# Altium PCB XPCAM_1V4.PCBDOC (part 2 of 2)
Units mil, origin at the board's own origin, x right, y up, seen from the top; angles counter-clockwise.
Board outline 2183.56 x 1446.93 mil, 6 copper layers (Top Layer, Mid-Layer 1, Mid-Layer 2, Mid-Layer 3, Mid-Layer 4, Bottom Layer); 49 components, 32 nets, 261 pads, 143 vias.
Unrouted connection lines stored in the file: 46.
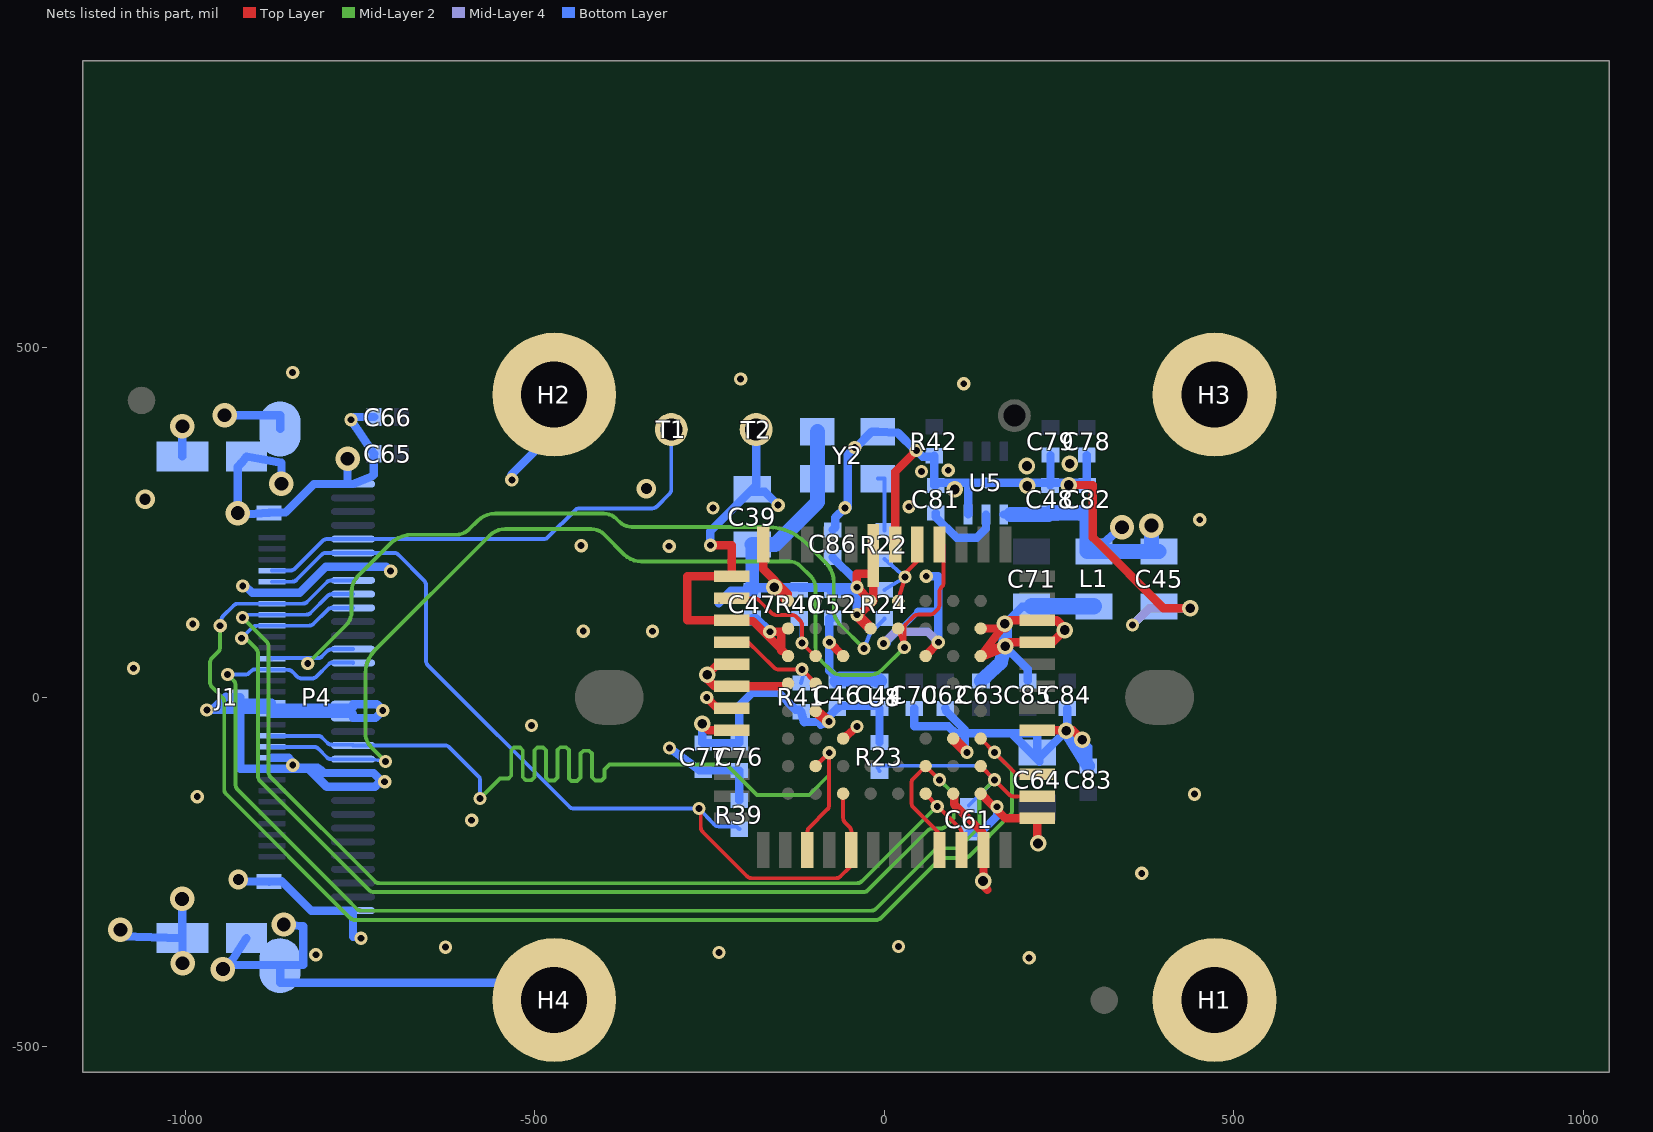
[diagram p5: the nets of this part, all layers, seen from the top]

## Via types
v1: diameter 19, hole 9.84, Top Layer to Bottom Layer, 101 vias
v2: diameter 23.62, hole 13.78, Top Layer to Bottom Layer, 22 vias
v3: diameter 35, hole 19.68, Top Layer to Bottom Layer, 12 vias
v4: diameter 16, hole 7.87, Top Layer to Bottom Layer, 3 vias
v5: diameter 27.95, hole 15.75, Top Layer to Bottom Layer, 3 vias
v6: diameter 20.47, hole 11.81, Top Layer to Bottom Layer, 1 vias
v7: diameter 0, hole 0, Top Layer to Bottom Layer, 1 vias

## Nets (pads, with @x,y where several pads share a name; then routed paths per layer and width w, separated by ;. In a path a pad name is that pad's centre, name@x,y a point inside that pad or via, vN(x,y) a via of type N, cw(c..) or ccw(c..) an arc to the next point about the centre after c; other vN are vias at no path point) (continued)
CMOS_OE: J1.23 P4.9 U1.H6 U8.28 | length 1605.4
  Top Layer w5.5: U1.H6@59.06,-137.8 59.06,-138.5 107.42,-186.86 cw(c100.61,-193.66) 110.24,-193.66 U8.28@110.24,-218.5
  Top Layer w6: U1.H6@59.06,-137.8 v1(75.54,-156.29)
  Mid-Layer 2 w5.5: v1(-918.33,114.17) -884.03,79.87 cw(c-890.83,73.06) -881.21,73.06 -881.21,-107 ccw(c-871.58,-107) -878.39,-113.8 -729.03,-263.17 ccw(c-722.22,-256.36) -722.22,-265.98 -39.08,-265.98 ccw(c-39.08,-256.36) -32.27,-263.17 70.59,-160.3 cw(c77.4,-167.11) 77.4,-157.48 v1(75.54,-156.29)
  Bottom Layer w5.5: v1(-918.33,114.17) -917.22,115.29 cw(c-910.41,108.49) -910.41,118.11 J1.23@-876.39,118.11 -827.6,118.11 ccw(c-827.6,127.74) -820.8,120.93 -796.9,144.82 cw(c-790.1,138.02) -790.1,147.64 P4.9@-760.25,147.64
CMOS_PCLK: J1.11 P4.21 U1.B5 U8.46 | length 1543.9
  Top Layer w5.5: v1(28.5,71.46) 28.5,98.44 cw(c38.13,98.44) 31.32,105.25 41.58,115.51 cw(c48.39,108.7) 48.39,118.33 64.65,118.33 ccw(c64.65,127.95) 71.45,121.15 75.94,125.64 ccw(c69.14,132.44) 78.76,132.44 78.76,150.56 cw(c88.39,150.56) 81.58,157.36 81.82,157.6 ccw(c75.01,164.41) 84.64,164.41 84.64,217.8 78.74,217.8 U8.46@78.74,218.5
  Top Layer w6: U1.B5@19.69,98.43 v1(28.5,71.46)
  Mid-Layer 2 w5.5: v1(-713.88,-91.85) -733.94,-71.79 cw(c-713,-50.85) -742.61,-50.85 -742.61,33.88 cw(c-694.76,33.88) -728.6,67.71 -565.11,231.2 cw(c-541.88,207.98) -541.88,240.82 -419.66,240.82 cw(c-419.67,214.25) -400.88,233.04 -372.36,204.52 ccw(c-347.35,229.53) -347.35,194.16 -135.42,194.16 cw(c-135.42,172.98) -120.44,187.95 -105.25,172.77 cw(c-121.47,156.55) -98.54,156.55 -98.54,72.05 ccw(c-70.35,72.05) -90.28,52.12 -76.34,38.18 ccw(c-61.3,53.22) -61.3,31.95 -21.18,31.95 ccw(c-21.18,56.51) -3.81,39.15 v1(28.5,71.46)
  Bottom Layer w5.5: J1.11@-876.39,-70.87 -816.64,-70.87 cw(c-816.64,-80.49) -809.84,-73.69 -797.76,-85.76 ccw(c-790.95,-78.96) -790.95,-88.58 P4.21@-760.25,-88.58 -734.54,-88.58 cw(c-734.54,-98.21) -732.98,-88.71 v1(-713.88,-91.85)
CMOS_RST: C61.2 J1.18 P4.14 R23.1 U1.G8 U8.32 | length 1954
  Top Layer w5.5: v1(157.48,-118.11) 178.28,-138.91 ccw(c185.09,-132.11) 185.09,-141.73 U8.32@218.5,-141.73
  Top Layer w6: U1.G8@137.8,-98.43 v1(157.48,-118.11)
  Mid-Layer 2 w5.5: v1(-939.64,32.5) -930.97,23.83 cw(c-937.78,17.02) -928.15,17.02 -928.15,-125.32 ccw(c-918.53,-125.32) -925.33,-132.12 -768.79,-288.66 -768.79,-288.75 -754.99,-302.55 ccw(c-748.18,-295.75) -748.18,-305.37 -18.97,-305.37 ccw(c-18.97,-295.75) -12.17,-302.55 71.62,-218.77 cw(c78.42,-225.57) 78.42,-215.95 101.56,-215.95 ccw(c101.56,-206.32) 108.37,-213.13 133.45,-188.05 ccw(c126.64,-181.24) 136.27,-181.24 136.27,-143.31 cw(c145.89,-143.31) 139.09,-136.5 v1(157.48,-118.11)
  Bottom Layer w5.5: v1(-939.64,32.5) -914.96,32.5 ccw(c-914.96,42.12) -908.11,35.36 -906.25,37.24 cw(c-899.4,30.48) -899.4,40.11 cw(c-899.4,30.48) -899.09,40.1 J1.18@-876.39,39.37 -853.82,39.37 cw(c-853.82,29.75) -847.02,36.55 -840.24,29.77 ccw(c-833.43,36.58) -833.43,26.95 -819.12,26.95 ccw(c-819.12,36.58) -812.32,29.77 -794.88,47.21 cw(c-788.07,40.4) -788.07,50.03 -760.3,50.03 P4.14@-760.25,49.21 ; R23.1@-7.1,-105.57 -9.96,-100.73 cw(c-3.15,-107.54) -3.15,-97.91 133.29,-97.91 cw(c133.29,-107.54) 140.1,-100.73 v1(157.48,-118.11) 120.75,-154.84 C61.2@120.61,-154.84
CMOS_VD: J1.12 P4.20 U1.G2 U8.21 | length 1447.5
  Top Layer w5.5: U8.21@-110.24,-218.5 -110.24,-193.03 cw(c-100.61,-193.03) -107.42,-186.22 -81.92,-160.73 ccw(c-88.73,-153.92) -79.1,-153.92 -79.1,-79.6 v1(-78.88,-79.38)
  Top Layer w6: U1.G2@-98.43,-98.43 v1(-78.88,-79.38)
  Mid-Layer 2 w5.5: v1(-578.45,-144.87) -549.85,-116.28 -537.97,-116.28 -533.85,-112.15 -533.85,-75.78 -529.72,-71.66 -521.47,-71.66 -517.35,-75.78 -517.35,-114.43 -513.22,-118.56 -504.97,-118.56 -500.85,-114.43 -500.85,-75.81 -496.72,-71.69 -488.47,-71.69 -484.35,-75.81 -484.35,-114.99 -480.22,-119.12 -471.97,-119.12 -467.85,-114.99 -467.85,-75.61 -463.72,-71.49 -455.47,-71.49 -451.35,-75.61 -451.35,-116.32 -447.99,-119.68 -439.74,-119.68 -434.85,-114.79 -434.85,-80.62 -430.72,-76.49 -422.47,-76.49 -418.35,-80.62 -418.35,-114.39 -413.62,-119.12 -405.01,-119.12 -400.67,-114.78 -400.67,-103.36 -393.22,-95.91 -226.1,-95.91 -182.44,-139.57 -107.6,-139.57 -78.88,-110.85 v1(-78.88,-79.38)
  Bottom Layer w5.5: J1.12@-876.39,-55.12 -810.99,-55.12 cw(c-810.99,-64.74) -804.18,-57.94 -797.09,-65.04 ccw(c-790.28,-58.23) -790.28,-67.86 -760.43,-67.86 P4.20@-760.25,-68.9 -628.8,-68.9 cw(c-628.8,-78.53) -622,-71.72 -581.26,-112.45 cw(c-588.07,-119.26) -578.45,-119.26 v1(-578.45,-144.87)
DGND: C39.1 C44.1 C45.1 C46.1 C47.1 C48.1 C52.1 C61.1 C65.1 C66.1 C76.2 C77.1 C78.1 C79.1 C81.1 C82.1 C86.1 H1.1 H2.1 H3.1 H4.1 J1.9 J1.10 J1.14 J1.15 J1.25 J1.33 J1.34 J1.35 J1.36 J1.37 J1.38 J1.39 P4.1 P4.7 P4.17 P4.18 P4.22 P4.23 P4.32 P4.33 P4.34 R39.2 R42.1 T2.1 U1.B1 U1.C1 U1.C3 U1.C6 U1.D1 U1.F3 U1.H7 U1.H8 U5.3 U5.7 U8.7 U8.9 U8.11 U8.12 U8.13 U8.29 U8.31 U8.48 Y2.2 | length 6791.9
  Top Layer w12: v1(-254.26,-0.2) -238.71,-15.75 U8.13@-218.5,-15.75 ; v1(-248.96,217.58) -218.5,217.58 U8.7@-218.5,173.23 -282.17,173.23 -282.17,110.24 U8.9@-218.5,110.24 -217.47,109.2 -187.94,109.2 -145.2,66.46 ; U8.11@-218.5,47.24 -220.3,45.45 -240.52,45.45 v2(-253.52,32.45) -252.73,31.66 -252.73,25.69 -242.78,15.75 U8.12@-218.5,15.75 -141.73,15.75 U1.D1@-137.8,19.69 ; v1(-163.94,93.79) -147.46,93.79 ; U1.C1@-137.8,59.06 -145.2,66.46 ; U1.B1@-137.8,98.43 -147.46,93.79 ; v1(-78.74,78.74) U1.C3@-59.06,59.06 ; U1.F3@-59.06,-59.06 v1(-39.07,-41.75) ; U8.48@15.75,218.5 15.75,323.05 v1(45.72,353.02) ; U1.C6@59.06,59.06 v1(77.19,78.74) ; U1.H7@98.43,-137.8 99.88,-137.8 99.88,-153.18 141.09,-194.4 141.09,-217.87 U8.29@141.73,-218.5 141.73,-270.06 147.33,-275.66 v2(141.12,-262.81) ; U1.H8@137.8,-137.8 v1@156.06,-156.06 ; v1(161.04,-156.52) v1@156.06,-156.06 ; v2(219.77,-209.08) 218.5,-209.08 U8.31@218.5,-173.23 173.23,-173.23 v1@156.06,-156.06 ; v2(263.82,303.7) 298.23,303.7 298.23,228.33 399.11,127.45 v2(437.51,127.45) ; -147.46,93.79 -147.46,66.46 -145.2,66.46
  Mid-Layer 4 w12: v1(-1.37,77.19) 15.03,93.59 62.34,93.59 v1(77.19,78.74) ; v1(355.07,103.39) 379.14,127.45 v2(437.51,127.45)
  Bottom Layer w7.87: v1@3.13,77.19 48.34,122.39
  Bottom Layer w12: v3(-1093.06,-332.62) -1093.06,-341.6 J1.36@-1004.34,-344.49 ; v3(-1004.82,-288.41) -1004.34,-293.69 J1.36@-1004.34,-344.49 ; J1.35@-1004.34,344.49 v3(-1004.34,387.69) ; v3(-1004.17,-380.42) -1004.17,-333.95 J1.36@-1004.34,-344.49 ; v3(-943.98,403.56) -864.58,403.56 P4.33@-864.58,383.86 ; v5(-924.24,-260.68) -922.01,-262.91 J1.37@-880.33,-263.78 -862.35,-262.91 -820.14,-305.12 P4.32@-760.25,-305.12 -760.25,-342.47 -751.04,-342.47 v1(-748.86,-344.65) ; v1(-918.05,159.16) -914.66,159.16 -904.48,149.74 ; J1.33@-912.61,-344.49 -932.6,-375.57 v3(-946.31,-388.81) -940.49,-382.99 -831.24,-382.99 ; J1.10@-876.39,-86.61 -852.31,-86.61 v1@-838.36,-100.57 ; J1.15@-876.39,-7.87 -921.67,-7.87 -921.67,-102.36 ; J1.25@-876.39,149.61 -876.52,149.74 -904.48,149.74 ; v3(-862.62,305.55) -862.62,335.51 J1.34@-912.61,344.49 -919.58,335.51 -925.09,330.01 v3(-925.09,263.5) -924.9,261.28 -919.45,261.28 J1.38@-880.33,263.78 -856.82,264.65 -816.35,305.12 P4.1@-768.06,305.12 ; v3(-859.25,-325.04) -831.24,-327.73 -831.24,-382.99 ; v3(-768.06,341.3) P4.1@-768.06,305.12 ; C66.1@-730.12,400.96 -759.25,400.96 v1(-763.19,397.02) C65.1@-730.11,348.23 -730.8,347.54 -730.8,318.04 -733.02,315.82 P4.1@-760.25,305.12 P4.1@-768.06,305.12 ; v1(-706.4,180.52) -712.88,187.01 P4.7@-760.25,187.01 -799.08,187.01 -836.36,149.74 -904.48,149.74 ; v1@-534.1,317.89 -458.29,393.7 H2.1@-472.44,433.07 ; H4.1@-472.44,-433.07 -433.07,-387.59 -436.8,-408.24 -864.58,-408.24 P4.34@-864.58,-383.86 -858.48,-382.99 -831.24,-382.99 ; v1(-307.44,-72.55) -264.96,-104.2 C77.1@-258.93,-104.78 C76.2@-207.5,-104.78 R39.2@-207.5,-147.63 ; v1(-248.96,217.58) -248.96,237.73 C39.1@-192.87,293.82 ; C47.1@-189.13,113.51 -183.66,113.51 v1(-163.94,93.79) ; T2.1@-183.44,383.03 -183.44,302.56 -184.13,302.56 C39.1@-189.13,297.56 C39.1@-192.87,293.82 ; v1(-151.98,274.9) -170.91,293.82 C39.1@-192.87,293.82 ; C52.1@-74,113.51 -78.74,113.51 v1(-78.74,78.74) -78.74,38.19 -62.9,22.34 C46.1@-67.43,23.55 ; C86.1@-74,239.56 -70.38,243.18 -70.38,257.16 v1(-56.49,271.05) -52.45,271.05 -52.45,347.3 v1(-42.36,357.39) -40.72,357.39 -18.18,379.92 Y2.2@-9.26,379.92 19.11,378.48 44.57,353.02 v1(45.72,353.02) 54.49,344.24 69.88,344.24 R42.1@71.48,345.84 C81.1@71.48,308.36 ; v1(-1.37,77.19) v1@3.13,77.19 ; 48.34,122.39 77.19,122.39 ; v1(59.91,173.25) 77.19,173.25 77.19,122.39 ; C81.1@73.34,303.02 71.48,303.02 C81.1@71.48,308.36 ; v1(77.19,78.74) 77.19,122.39 ; U5.3@119.67,261.49 119.67,306.77 U5.7@145.26,306.77 ; C61.1@120.61,-194.21 136.66,-194.21 161.04,-169.84 v1(161.04,-156.52) ; C48.1@236.86,303.02 237.68,303.85 C79.1@237.68,346.63 ; C78.1@289.43,346.63 289.43,303.85 C82.1@290.26,303.02 286.51,306.77 U5.7@145.26,306.77 ; v1(355.07,103.39) 379.28,127.59 390.65,127.59 C45.1@392.98,129.92 ; -921.67,-102.36 J1.9@-876.39,-102.36 -809.3,-102.36 ; -921.67,-102.36 J1.39@-921.67,0 -921.71,0 -942.25,0.87 -958.1,-14.98 v1(-969.38,-18.14) -880.22,-18.14 J1.14@-876.39,-23.62 ; J1.14@-876.39,-23.62 -876.39,-15.01 -760.25,-15.01 P4.17@-760.25,-9.84 -726.3,-9.84 -717.76,-18.39 v1(-717.76,-18.88) -717.76,-19.25 -728.04,-29.53 P4.18@-760.25,-29.53 -760.25,-23.62 J1.14@-876.39,-23.62 ; v1@-838.36,-100.57 -811.1,-100.57 -809.3,-102.36 ; v1@-838.36,-100.57 -837.43,-101.49 -824.26,-101.49 -797.8,-127.95 P4.23@-760.25,-127.95 -728.73,-127.95 -723.53,-122.74 -716.37,-122.74 -716.34,-120.79 v1(-714.99,-120.81) -716.99,-118.81 -718.64,-120.47 -730.84,-108.27 P4.22@-760.25,-108.27 -802.17,-108.27 -806.83,-103.62 -808.05,-103.62 -809.3,-102.36 ; C81.1@71.48,308.36 73.07,306.77 U5.7@145.26,306.77
  Bottom Layer w21.65: C46.1@-67.43,23.55 -62.9,26.34 -14.8,26.34 C44.1@-7.1,23.55
  other v1: 207.1,-372.76 -813.41,-368.28 -236.58,-364.95 -627.88,-357.48 20.13,-356.59 368.2,-251.84 -590.58,-175.96 -983.04,-142.14 443.77,-138.52 -846.47,-97.05 -504.87,-40.44 -1074.33,41.51 -331.75,94.45 -430.78,94.69 -989.49,104.61 -308.01,216.04 -433.84,216.93 451.1,253.94 -245.35,270.86 35.11,272.55 -533.03,311.13 53.16,323.2 91.32,324.79 113.58,448.53 -205.68,455.51 -846.65,464.82
  other v2: 100.81,297.39 204.28,302.34 203.94,330.92 265.33,334.14
  other v5: -1057.75,283.35 -340.57,298.67
EXPOSURE: J1.26 P4.6 R39.1 U1.H3 U8.23 | length 1335.1
  Top Layer w5.5: v1(-265.33,-159.2) v1@-264.07,-160.11 ; U1.H3@-59.06,-137.8 -59.06,-172.37 ccw(c-49.43,-172.37) -56.24,-179.17 -50.06,-185.34 cw(c-56.87,-192.15) -47.24,-192.15 U8.23@-47.24,-218.5 U8.23@-47.24,-236.63 ; v1@-264.07,-160.11 cw(c-269.68,-167.92) v1@-262.87,-161.12 ; v1@-264.07,-160.11 cw(c-269.68,-167.92) v1@-262.87,-161.12 ; v1@-262.87,-161.12 -262.73,-161.26 -262.73,-185.78 ; -262.73,-185.78 ccw(c-253.1,-185.78) -259.91,-192.58 ; -262.73,-185.78 ccw(c-253.1,-185.78) -259.91,-192.58 ; -259.91,-192.58 -196.48,-256.01 ; -196.48,-256.02 ccw(c-189.67,-249.21) -189.67,-258.83 ; -196.48,-256.02 ccw(c-189.67,-249.21) -189.67,-258.83 ; -189.67,-258.83 -69.44,-258.83 ; -69.44,-258.83 ccw(c-69.44,-249.21) -62.64,-256.02 ; -69.44,-258.83 ccw(c-69.44,-249.21) -62.64,-256.02 ; -62.64,-256.01 U8.23@-50.06,-243.44 ; U8.23@-50.06,-243.44 ccw(c-56.87,-236.63) U8.23@-47.24,-236.63 ; U8.23@-50.06,-243.44 ccw(c-56.87,-236.63) U8.23@-47.24,-236.63
  Bottom Layer w5.5: J1.26@-876.39,165.35 -875.69,165.37 cw(c-875.44,155.75) -875.44,165.38 -847.69,165.38 ccw(c-847.69,175) -840.88,168.19 -805.2,203.88 cw(c-798.4,197.07) -798.4,206.7 P4.6@-760.25,206.69 -702.12,206.7 cw(c-702.12,197.07) -695.32,203.88 -658.69,167.25 cw(c-665.49,160.44) -655.87,160.44 -655.87,52.51 ccw(c-646.24,52.51) -653.05,45.7 -450.97,-156.38 ccw(c-444.16,-149.57) -444.16,-159.2 v1(-265.33,-159.2) -243.95,-181.68 ccw(c-236.98,-175.04) -236.98,-184.67 -215.39,-184.67 cw(c-215.39,-194.29) -208.59,-187.49 R39.1@-207.5,-188.58
LEDOUT0: J1.22 P4.10 U1.G6 U8.27 | length 1728.3
  Top Layer w5.5: U1.G6@59.06,-98.43 41.37,-116.11 ccw(c48.18,-122.91) 38.55,-122.91 38.55,-150.87 ccw(c48.18,-150.87) 41.37,-157.68 75.92,-192.23 cw(c69.12,-199.04) 78.74,-199.04 U8.27@78.74,-218.5
  Top Layer w6: U1.G6@59.06,-98.43 v1(78.74,-118.11)
  Mid-Layer 2 w5.5: v1(-919.55,84.56) -917.95,84.56 cw(c-917.95,74.94) -911.14,81.74 -899.08,69.67 cw(c-905.88,62.87) -896.26,62.87 -896.26,-112.92 ccw(c-886.63,-112.92) -893.44,-119.73 -737.29,-275.88 ccw(c-730.48,-269.08) -730.48,-278.7 -30.21,-278.7 ccw(c-30.21,-269.08) -23.41,-275.88 61.97,-190.5 cw(c68.78,-197.31) 68.78,-187.68 80.9,-187.68 ccw(c80.9,-178.06) 87.7,-184.86 96.29,-176.28 ccw(c89.49,-169.47) 99.11,-169.47 99.11,-142.47 ccw(c89.49,-142.47) 96.29,-135.66 v1(78.74,-118.11)
  Bottom Layer w5.5: v1(-919.55,84.56) -904.57,99.54 cw(c-897.76,92.74) -897.76,102.36 J1.22@-876.39,102.36 -823.61,102.36 ccw(c-823.61,111.99) -816.8,105.18 -796.85,125.14 cw(c-790.04,118.33) -790.04,127.95 P4.10@-760.25,127.95
MCLK27M: R22.1 R24.1 U1.A5 U8.47 | length 163.2
  Top Layer w5.5: v1(29.4,171.97) 29.4,177.16 47.24,195.01 U8.47@47.24,218.5
  Top Layer w6: U1.A5@19.69,137.8 v1(29.4,171.97)
  Bottom Layer w5.5: R24.1@0,153.67 v1(29.4,171.97) R22.1@0,197.74
MCLK27M': J1.19 P4.13 R24.2 | length 1492.4
  Mid-Layer 2 w5.5: v1(-825.02,48.39) -770.4,103.01 ; v1(-29.19,69.82) -63.98,104.61 ; -770.4,103.01 ccw(c-790,122.61) -762.28,122.61 ; -770.4,103.01 ccw(c-790,122.61) -762.28,122.61 ; -762.28,122.61 -762.28,151.36 ; -762.28,151.36 cw(c-730.74,151.36) -753.04,173.66 ; -762.28,151.36 cw(c-730.74,151.36) -753.04,173.66 ; -753.04,173.66 -707.26,219.44 ; -707.26,219.44 cw(c-675.36,187.53) -675.36,232.66 ; -707.26,219.44 cw(c-675.36,187.53) -675.36,232.66 ; -675.36,232.66 -612.81,232.66 ; -612.81,232.66 ccw(c-612.81,259.17) -594.06,240.42 ; -612.81,232.66 ccw(c-612.81,259.17) -594.06,240.42 ; -594.06,240.42 -582.28,252.2 ; -582.28,252.2 cw(c-556.26,226.18) -556.26,262.98 ; -582.28,252.2 cw(c-556.26,226.18) -556.26,262.98 ; -556.26,262.98 -401.72,262.98 ; -401.72,262.98 cw(c-401.72,237.5) -383.7,255.52 ; -401.72,262.98 cw(c-401.72,237.5) -383.7,255.52 ; -383.7,255.52 -379.43,251.25 ; -379.43,251.25 ccw(c-361.09,269.59) -361.09,243.65 ; -379.43,251.25 ccw(c-361.09,269.59) -361.09,243.65 ; -361.09,243.65 -167.72,243.65 ; -167.73,243.65 cw(c-167.73,165.16) -112.22,220.66 ; -167.73,243.65 cw(c-167.73,165.16) -112.22,220.66 ; -112.22,220.66 -83.81,192.25 ; -83.81,192.25 cw(c-111.3,164.75) -72.42,164.75 ; -83.81,192.25 cw(c-111.3,164.75) -72.42,164.75 ; -72.42,124.99 ccw(c-43.6,124.99) -63.98,104.61 ; -72.42,124.99 ccw(c-43.6,124.99) -63.98,104.61 ; -72.42,124.99 -72.42,164.75
  Bottom Layer w5.5: J1.19@-876.39,55.12 -875.52,55.99 v1@-825.02,55.99 ; v1(-825.02,48.39) v1@-825.02,55.99 ; P4.13@-760.25,68.9 -790.29,68.9 ccw(c-790.29,59.27) -797.1,66.08 -804.37,58.8 cw(c-811.18,65.61) -811.18,55.99 v1@-825.02,55.99 ; v1(-29.19,69.82) -21.31,89.39 ; R24.2@0,112.73 0,111.79 -19.19,92.6 ; -21.31,89.39 cw(c-12.38,85.79) -19.19,92.6 ; -21.31,89.39 cw(c-12.38,85.79) -19.19,92.6
NETC81_2: C81.2 U5.2 | length 115.3
  Bottom Layer w11.81: C81.2@73.34,263.65 73.38,263.61 73.38,258.14 103.19,228.33 132.3,228.33 145.26,241.29 U5.2@145.26,261.49
NETR22_2: R22.2 Y2.3 | length 83.6
  Bottom Layer w5.5: Y2.3@-9.26,312.99 0,312.99 R22.2@0,238.68
NETR40_1: R40.1 U1.C2 U8.8 | length 206.6
  Top Layer w5.5: U8.8@-218.5,141.73 -186.67,141.73 cw(c-186.67,132.11) -179.86,138.91 -161.56,120.61 ccw(c-154.76,127.42) -154.76,117.79 -132.56,117.79 cw(c-132.56,108.17) -125.75,114.97 -120.8,110.02 cw(c-127.6,103.21) -117.98,103.21 -117.98,80.04 v1(-117.98,77.83) -118.25,77.55 -99.76,59.06 U1.C2@-98.43,59.06
  Bottom Layer w5.5: R40.1@-122.1,112.73 -118.4,105.33 -118.4,77.83 v1(-117.98,77.83)
NETR41_1: R41.1 U1.D2 U8.10 | length 167.4
  Top Layer w5.5: U8.10@-218.5,78.74 -194.54,78.74 -193.66,77.86 -178.8,63 -178.47,63 -158,42.53 ccw(c-151.19,49.33) -151.19,39.71 -118.2,39.71 v1(-117.95,39.96) -117.69,39.96 -117.17,39.44 -98.43,20.69 U1.D2@-98.43,19.69
  Bottom Layer w5.5: R41.1@-119.23,20.52 -114.7,37 -115.62,37.76 -116.67,40.38 v1(-117.95,39.96)
STANDBY: J1.24 P4.8 U1.F8 U8.33 | length 1934.8
  Top Layer w5.5: U1.F8@137.8,-59.06 v1(157.48,-78.74) 188.55,-109.81 188.55,-110.24 U8.33@218.5,-110.24
  Mid-Layer 2 w5.5: v1(-950.38,102.41) -950.38,71.74 cw(c-960.01,71.74) -953.2,64.94 -961.94,56.2 ccw(c-955.13,49.39) -964.76,49.39 -964.76,21.57 ccw(c-955.13,21.57) -961.94,14.77 -947.34,0.17 cw(c-954.15,-6.64) -944.52,-6.64 -944.52,-131.64 ccw(c-934.9,-131.64) -941.7,-138.45 -764.43,-315.72 ccw(c-757.62,-308.91) -757.62,-318.54 -11.74,-318.54 ccw(c-11.74,-308.91) -4.94,-315.72 78.2,-232.58 cw(c85.01,-239.39) 85.01,-229.76 114.75,-229.76 ccw(c114.75,-220.14) 121.55,-226.94 179.92,-168.57 ccw(c173.12,-161.76) 182.74,-161.76 182.74,-107.99 ccw(c173.12,-107.99) 179.92,-101.18 v1(157.48,-78.74)
  Bottom Layer w5.5: v1(-950.38,102.41) -949.03,103.76 -949.03,109.38 cw(c-939.4,109.38) -946.21,116.18 -931.35,131.04 cw(c-924.55,124.23) -924.55,133.86 J1.24@-876.39,133.86 -832.45,133.86 ccw(c-832.45,143.48) -825.64,136.68 -797.81,164.51 cw(c-791.01,157.7) -791.01,167.32 P4.8@-760.25,167.33
TEST1: J1.27 P4.5 T1.1 | length 704.9
  Bottom Layer w5.5: J1.27@-876.39,181.1 -875.96,181.53 -849.95,181.53 ccw(c-849.95,191.15) -843.14,184.35 -814.04,213.45 -803.93,223.56 cw(c-797.12,216.76) -797.12,226.38 P4.5@-760.25,226.38 -487.93,226.38 ccw(c-487.93,236.01) -481.13,229.2 -442.85,267.48 cw(c-436.04,260.67) -436.04,270.3 -332.32,270.3 ccw(c-332.32,279.92) -325.51,273.12 -307.76,290.87 ccw(c-314.56,297.68) -304.94,297.68 T1.1@-304.94,383.03
VAA3.3V: C62.2 C63.2 C64.2 C70.2 C71.2 C83.2 C84.2 C85.2 L1.2 U1.B8 U1.C8 U1.F7 U8.35 U8.39 U8.40 | length 1370.3
  Top Layer w12: U1.C8@137.8,59.06 v2(172.36,104.98) ; U1.B8@137.8,98.43 v2@173.95,98.43 ; v2@164.44,70.3 v2(172.79,73.14) ; v2@173.95,79.04 172.79,77.88 v2(172.79,73.14) ; v2@173.95,109.73 174.45,110.24 U8.40@218.5,110.24 246.54,110.24 257.97,98.81 v2(257.97,96.2) 240.51,78.74 U8.39@218.5,78.74 178.39,78.74 v2(172.79,73.14) ; U8.35@218.5,-47.24 v2@257.33,-47.24 ; v2(260.01,-47.99) v2@257.33,-47.24 ; v2(283.03,-60.55) 269.73,-47.24 v2@257.33,-47.24
  Top Layer w15.75: U1.F7@98.43,-59.06 v1(118.11,-78.74) ; U1.C8@137.8,59.06 v2@164.44,70.3
  Bottom Layer w12: C70.2@42.88,-15.86 42.88,-41.52 91.62,-41.52 101.35,-51.25 115.07,-51.25 ; C62.2@87.28,-15.86 88.23,-19.69 115.07,-46.52 115.07,-51.25 ; v1(118.11,-78.74) 115.07,-75.7 115.07,-51.25 ; v2(172.36,104.98) 196.76,129.38 214.69,129.38 C71.2@210.63,129.92 ; v2(172.79,73.14) 172.79,72.52 204.82,40.49 C85.2@204.82,23.51 ; C84.2@261.3,-15.86 261.3,-46.69 v2(260.01,-47.99) 221.91,-86.08 C64.2@221.91,-91.1 ; v2(283.03,-60.55) 283.03,-62.58 291.49,-71.04 C83.2@291.49,-98.43 ; 115.07,-51.25 181.51,-51.25 ; 181.51,-51.25 182.07,-51.25 ; 181.51,-51.25 221.91,-91.66 C64.2@218.76,-78.74 ; 182.07,-51.25 C64.2@221.91,-91.1 ; 182.07,-51.25 218.76,-51.25 C64.2@218.76,-78.74 ; C64.2@218.76,-78.74 221.91,-92.03 C64.2@221.91,-91.1
  Bottom Layer w19.68: v2(172.36,104.98) v2(172.79,73.14) ; v2(260.01,-47.99) C83.2@291.49,-98.43
  Bottom Layer w20: C63.2@138.12,23.51 144.41,29.2 166.5,49.68 v2(172.79,73.14)
  Bottom Layer w23.62: C71.2@210.63,129.92 L1.2@299.83,129.92
VDD3.3V: C39.2 C44.2 C45.2 C46.2 C47.2 C48.2 C52.2 C76.1 C77.2 C82.2 C86.2 L1.1 R23.2 R40.2 R41.2 U1.A1 U1.A4 U1.B4 U1.E2 U5.1 U8.1 U8.6 U8.14 Y2.1 Y2.4 | length 1975.6
  Top Layer w12: v2(-260.83,-37.87) -251.5,-47.2 U8.14@-218.5,-47.24 U8.14@-218.5,-47.24 ; U8.6@-173.23,218.5 -173.23,183.16 -137.9,147.83 -137.9,137.9 U1.A1@-137.8,137.8 ; v1@-37.51,116.25 -15.75,138.02 U8.1@-15.75,176.94 ; U1.A4@-19.69,137.8 v1(-39.37,157.48) -39.37,176.94 U8.1@-15.75,176.94 ; U8.1@-15.75,202.76 U8.1@-15.75,176.94
  Top Layer w15.75: v2(-157.48,157.48) U1.A1@-137.8,137.8 ; U1.E2@-98.43,-19.69 v1(-79.53,-34.85) ; v1(-39.37,118.11) -37.51,116.25 U1.B4@-19.69,98.43
  Bottom Layer w5.5: C47.2@-189.13,152.88 -162.08,152.89 v2(-157.48,157.48) ; R40.2@-122.1,153.67 -78.49,153.67 C52.2@-74,152.88 -74,157.48 v1@-40.76,157.48 ; v1@-40.76,157.48 v1(-39.37,157.48) -39.94,158.31 v1@-40.76,157.48
  Bottom Layer w12: v2(-260.83,-37.87) -260.83,-65.41 C77.2@-258.93,-65.42 C76.1@-207.5,-65.42 -207.5,-11.91 -188.81,6.78 -151.79,6.78 -127.22,-17.79 -121.87,-17.79 R41.2@-119.23,-20.42 -114.7,-35.96 v1(-79.53,-34.85) -91.43,-39.37 -67.87,-15.82 C46.2@-67.43,-15.82 -62.9,-12.53 -10.77,-12.48 C44.2@-7.1,-15.82 R23.2@-7.1,-64.63 ; v7(-236.76,134.63) -236.76,135.32 -219.67,152.4 C47.2@-189.13,152.88 -196.1,156.59 -196.1,157.48 v2(-157.48,157.48) -40.76,157.48 -40.76,166.95 C86.2@-74,200.19 ; C52.2@-74,152.88 -76.51,151.7 -39.37,151.7 v1(-39.37,118.11) ; U5.1@170.85,261.49 180.37,261.49 ; L1.1@299.83,208.66 v3(339.93,243.44)
  Bottom Layer w19.68: C47.2@-189.13,152.88 C39.2@-189.13,218.82
  Bottom Layer w21.65: C39.2@-189.13,218.82 -156.21,218.82 -95.88,279.16 Y2.4@-95.88,312.99 Y2.1@-95.88,379.92 ; 180.37,261.49 234.69,261.49 C48.2@236.86,263.65 C82.2@290.26,263.65 290.26,208.66 L1.1@299.83,208.66 C45.2@392.98,208.66 381.98,208.66 v3(381.98,245.65)
pads on no net: J1.31 J1.32 LM1.1 LM1.2 M1.1 M2.1 U1.A2 U1.A3 U1.A6 U1.B2 U1.B3 U1.B6 U1.D7 U1.D8 U1.E7 U1.E8 U1.G3 U1.G5 U1.H5 U5.5 U8.2 U8.3 U8.4 U8.5 U8.22 U8.26 U8.36 U8.37 U8.44 U8.45

## Keep-outs
Keep-Out Layer:
  region: -426.02,55.23 -432.26,53.34 -442.39,47.93 -451.26,40.64 -458.54,31.77 -463.95,21.65 -467.28,10.67 -468.41,-0.76 -467.28,-12.18 -463.95,-23.16 -458.54,-33.29 -451.26,-42.16 -442.39,-49.44 -432.26,-54.85 -426.02,-56.75 -426.02,-56.74 -368.26,-57.1 -367.24,-56.96 -353.21,-51.15 -341.16,-41.9 -331.91,-29.85 -326.1,-15.82 -324.11,-0.76 -326.1,14.3 -331.91,28.34 -341.16,40.39 -353.21,49.64 -367.24,55.45 -368.26,55.58 -368.37,55.23 -426.02,55.23
  region: 426.55,-55.7 432.8,-53.81 442.92,-48.4 451.79,-41.11 459.08,-32.24 464.49,-22.12 467.82,-11.14 468.94,0.29 467.82,11.71 464.49,22.69 459.08,32.82 451.79,41.69 442.92,48.97 432.8,54.38 426.55,56.28 426.56,56.27 369,56.63 367.99,56.49 353.95,50.68 341.9,41.43 332.66,29.38 326.84,15.35 324.86,0.29 326.84,-14.77 332.66,-28.81 341.9,-40.86 353.95,-50.11 367.99,-55.92 369,-56.05 369.11,-55.69 426.56,-55.69

## Other copper
Top Layer:
  region net VAA3.3V: 178.87,114.65 153.49,64.96 178.87,64.96 178.87,114.65
Mid-Layer 1:
  region: 3.94,44.23 3.94,-51.03 127.33,-51.03 127.33,44.23 3.94,44.23
Bottom Layer:
  region net DGND: -864.47,464.2 -864.47,373.48 -746.87,373.48 -746.87,402.88 -827.51,402.88 -827.51,464.2 -864.47,464.2
  region net DGND: 75.95,324.11 75.95,291.11 301.47,291.11 301.47,324.11 75.95,324.11
  region net DGND: -859.25,-319.51 -859.25,-464.83 -823.31,-464.83 -823.31,-407.71 -756.11,-407.71 -756.11,-370.75 -823.31,-370.75 -823.31,-319.51 -859.25,-319.51
  region net DGND: -1073.91,-288.08 -1073.91,-356.48 -915.92,-356.48 -915.92,-288.08 -1073.91,-288.08
  region net DGND: -1077.42,346.95 -1077.42,297.14 -860.56,297.14 -860.56,346.95 -1077.42,346.95

## Silkscreen, mask and mechanical layers (free items; w line width, h text height)
Top Overlay:
  lines w9.84: -164.48,203.38 -140.87,179.77 -115.3,205.34 -164.48,205.34 -164.48,203.38
  lines w10: -1031.13,-253.17 -597.85,-253.17 -597.85,-135.06 -1031.13,-135.06 -1031.13,-253.17 ; -1031.13,-134.82 -597.85,-134.82 -597.85,-16.68 -1031.13,-16.68 -1031.13,-134.82 ; -814.96,-252.85 -598.28,-252.85 -598.28,-16.68 -814.96,-16.68 -814.96,-252.85
  text "XPCAM" at -965.34,183.36 h100
  text "1V4" at -896.42,70.14 h100
  text "BW" at -775.08,-109.15 h100
  text "CL" at -774.19,-228.28 h100
Bottom Overlay:
  lines w9.84: -48.12,-248.78 54.96,-248.78 54.96,-132.22 -48.12,-132.22 -48.12,-248.78
  text "XPCAM" at -303.06,187.37 h100
  text "1V4" at -370.92,97.83 h100
Drill Drawing:
  lines w1: -1141.73,501.97 -1141.71,501.97 ; 551.18,-501.97 551.21,-501.97 ; 472.44,433.07 472.47,433.07 ; 472.44,433.07 472.47,433.07 ; -472.44,433.07 -472.41,433.07 ; -393.7,0 -393.67,0 ; 393.7,0 393.73,0 ; 472.44,-433.07 472.47,-433.07 ; 551.18,501.97 551.21,501.97 551.18,501.97
  lines w3.94: -1141.73,-462.6 ccw(c-1102.36,-462.6) -1102.36,-501.97 511.81,-501.97 ccw(c511.81,-462.6) 551.18,-462.6 551.18,462.6 ccw(c511.81,462.6) 511.81,501.97 -1102.36,501.97 ccw(c-1102.36,462.6) -1141.73,462.6 -1141.73,-462.6
  lines w10: -1141.73,551.97 -1141.73,905.52 ; -482.09,855.52 -1141.73,855.52 ; -472.44,483.07 -472.44,790.28 ; -393.7,50 -393.7,654.4 ; -186.82,740.28 -472.44,740.28 ; -185.68,604.4 -393.7,604.4 ; -108.46,855.52 551.18,855.52 ; 185.68,604.4 393.7,604.4 ; 186.82,740.28 472.44,740.28 ; 393.7,50 393.7,654.4 ; 472.44,483.07 472.44,790.28 ; 522.44,-433.07 769.83,-433.07 ; 522.44,433.07 769.83,433.07 ; 551.18,551.97 551.18,905.52 ; 601.18,-501.97 957.47,-501.97 ; 601.18,501.97 957.47,501.97 ; 719.83,-73.82 719.83,-433.07 ; 719.83,61.18 719.83,433.07 ; 907.47,62.45 907.47,-501.97 ; 907.47,197.45 907.47,501.97 ; -1141.73,855.52 -1041.73,880.52 -1041.73,830.52 -1141.73,855.52 ; -472.44,740.28 -372.44,765.28 -372.44,715.28 -472.44,740.28 ; -393.7,604.4 -293.7,629.4 -293.7,579.4 -393.7,604.4 ; 393.7,604.4 293.7,579.4 293.7,629.4 393.7,604.4 ; 472.44,740.28 372.44,715.28 372.44,765.28 472.44,740.28 ; 551.18,855.52 451.18,830.52 451.18,880.52 551.18,855.52 ; 719.83,-433.07 694.83,-333.07 744.83,-333.07 719.83,-433.07 ; 719.83,433.07 744.83,333.07 694.83,333.07 719.83,433.07 ; 907.47,-501.97 882.47,-401.97 932.47,-401.97 907.47,-501.97 ; 907.47,501.97 932.47,401.97 882.47,401.97 907.47,501.97
  text "43.0mm" at -452.09,818.02 h50
  text "24.0mm" at -156.82,702.78 h50
  text "20.0mm" at -155.68,566.9 h50
  text "25.5mm" at 762.12,92.45 h50
  text "22.0mm" at 582.71,-43.82 h50